# Altium PCB MC_CK.PcbDoc
Units mm, origin at the board's own origin, x right, y up, seen from the top; angles counter-clockwise.
Board outline 167.51 x 90.01 mm, 2 copper layers (Top Layer, Bottom Layer); 6 components, 0 nets, 144 pads, 0 vias.
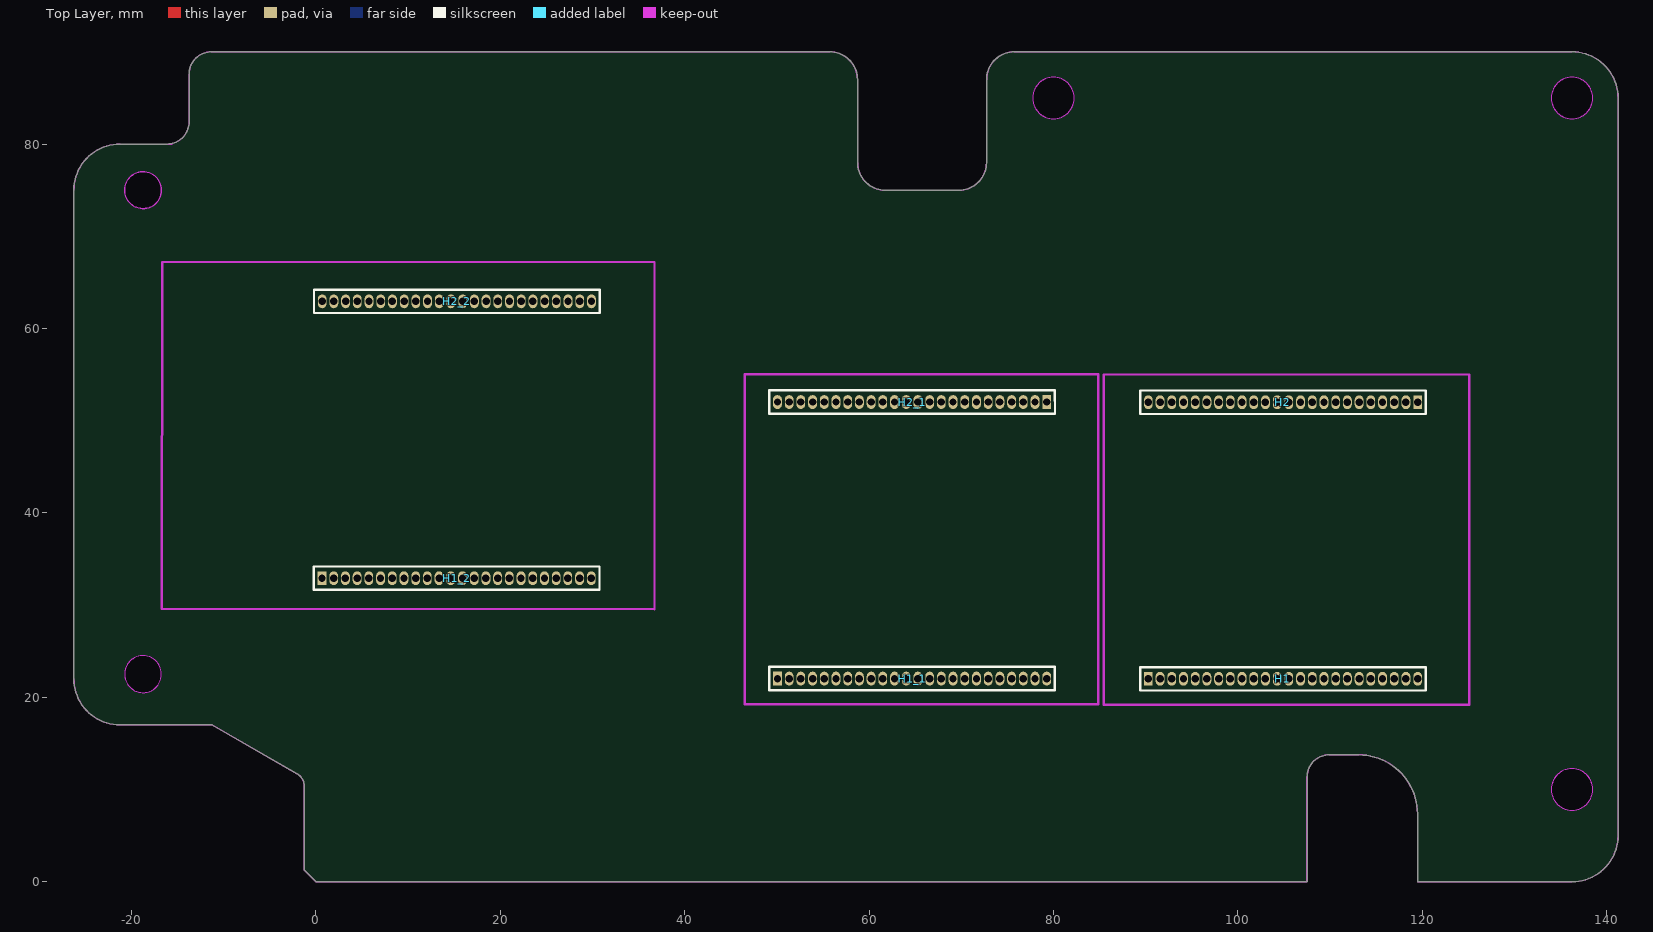
[diagram p0: Top Layer view]
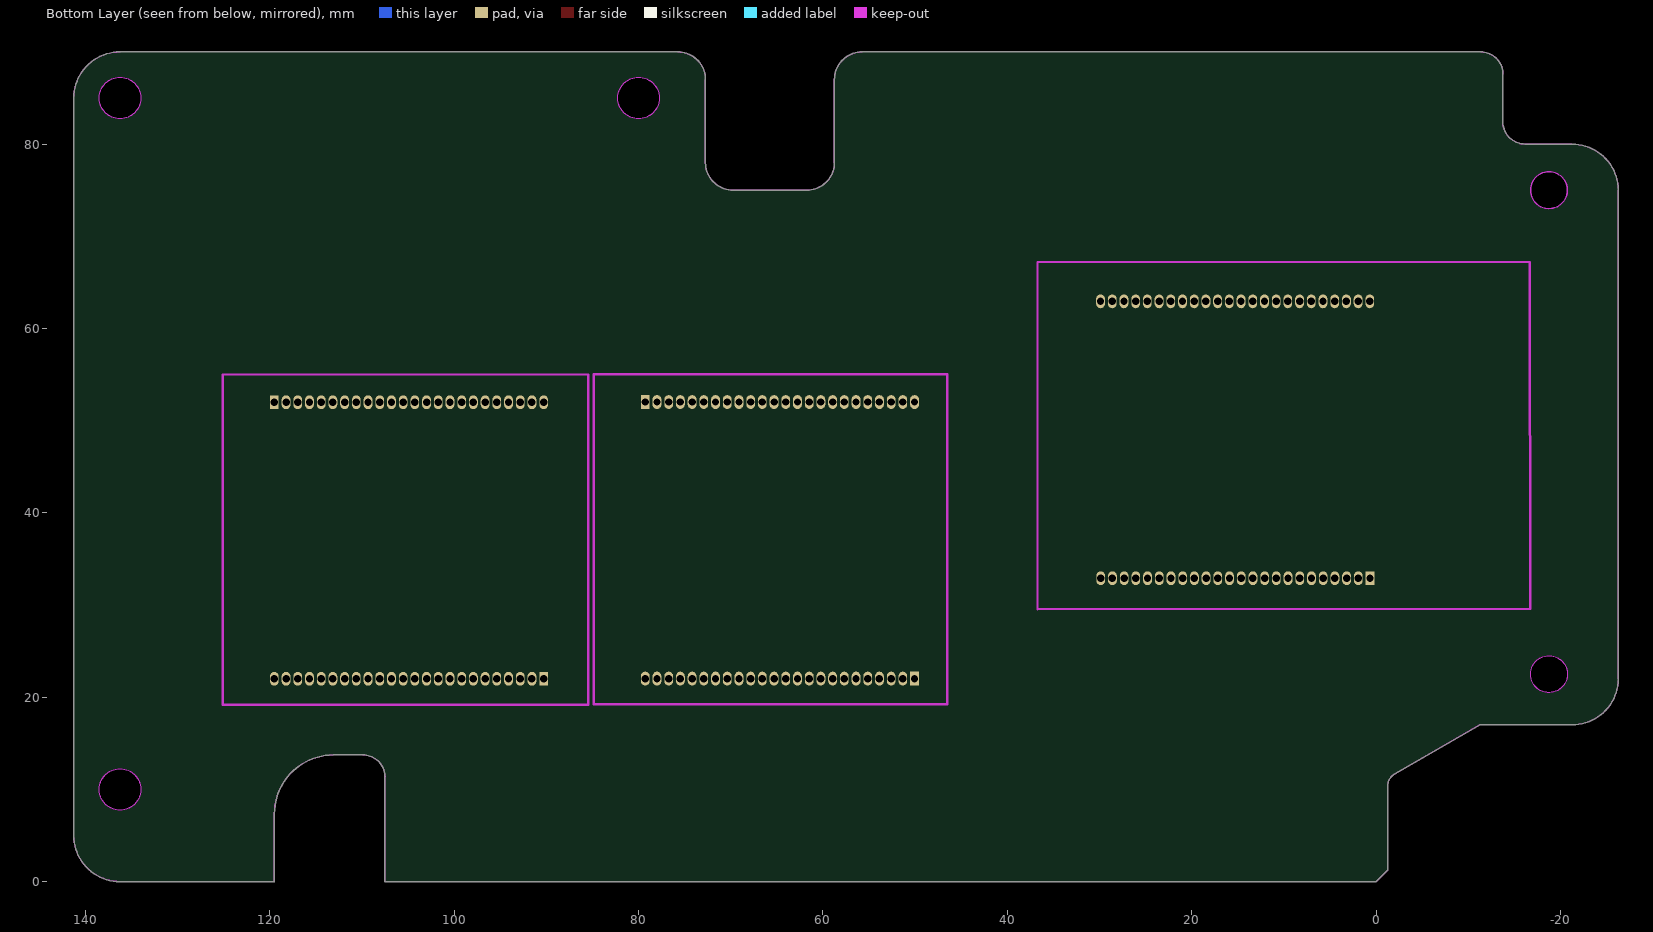
[diagram p1: Bottom Layer view, seen from below]

## Layer stack, top to bottom
Top Solder: solder mask 0.0102, Solder Resist, Dk 3.5
Top Layer: signal copper 0.0356
Dielectric 1: dielectric 0.32, FR-4, Dk 4.8
Bottom Layer: signal copper 0.0356
Bottom Solder: solder mask 0.0102, Solder Resist, Dk 3.5

## Board outline
-11.252,16.993 -2.056,11.706 -2.056,11.705 cw(c-2.85,10.324) -1.257,10.324 -1.257,1.25 -1.255,1.245 -0.005,-0.005 0,-0.007 107.5,-0.007 107.507,0 107.507,11.35 cw(c109.9,11.35) 109.9,13.743 113.1,13.743 cw(c113.1,7.35) 119.493,7.35 119.493,0 119.5,-0.007 136.25,-0.007 ccw(c136.25,5) 141.257,5 141.257,85 ccw(c136.25,85) 136.25,90.007 75.75,90.007 ccw(c75.75,87) 72.743,87 72.743,78 cw(c69.75,78) 69.75,75.007 61.75,75.007 cw(c61.75,78) 58.757,78 58.757,87 ccw(c55.75,87) 55.75,90.007 -11.35,90.007 ccw(c-11.35,87.6) -13.757,87.6 -13.757,82.4 cw(c-16.15,82.4) -16.15,80.007 -21.25,80.007 ccw(c-21.25,75) -26.257,75 -26.257,22 ccw(c-21.25,22) -21.25,16.993
cut-out: 134,85 ccw(c136.25,85) 136.25,82.75 ccw(c136.25,85) 138.5,85 ccw(c136.25,85) 136.25,87.25 ccw(c136.25,85)
cut-out: 134,10 ccw(c136.25,10) 136.25,7.75 ccw(c136.25,10) 138.5,10 ccw(c136.25,10) 136.25,12.25 ccw(c136.25,10)
cut-out: 77.75,85 ccw(c80,85) 80,82.75 ccw(c80,85) 82.25,85 ccw(c80,85) 80,87.25 ccw(c80,85)
cut-out: -18.75,73 cw(c-18.75,75) -20.75,75 cw(c-18.75,75) -18.75,77 cw(c-18.75,75) -16.75,75 cw(c-18.75,75)
cut-out: -20.75,22.5 ccw(c-18.75,22.5) -18.75,20.5 ccw(c-18.75,22.5) -16.75,22.5 ccw(c-18.75,22.5) -18.75,24.5 ccw(c-18.75,22.5)

## Design rules (kind name [scope] priority, off if disabled: settings)
Clearance [All] p1: gap=0.254 ignorepadtopadclearanceinfootprint=FALSE except(0: Arc-Hole Track-Hole SMDPad-Hole THPad-Hole Via-Hole Fill-Hole Poly-Hole Region-Hole Text-Hole)
PolygonConnect [All] p1: connectstyle=Relief reliefconductorwidth=0.254 reliefentries=4 polygonreliefangle="90 Angle" airgapwidth=0.254
RoutingVias [All] p1: holewidth=0.711 width=1.27 viastyle="Through Hole" minholewidth=0.711 minwidth=1.27 maxholewidth=0.711 maxwidth=1.27
SolderMaskExpansion [All] p1: expansion=0.102 istentingtop=FALSE
Width [All] p1: maxlimit=0.254 minlimit=0.254 preferedwidth=0.254
30 further rules are at their usual default settings.

## Components (designator, comment, footprint, x,y, rotation, side; value= is the part's Value field where it differs from the comment)
H1 "Header 24" "header 24"#1 104.902,21.996 r0 top
H1_1 "Header 24" "header 24"#1 64.668,22.021 r0 top (schematic designator H1)
H1_2 "Header 24" "header 24"#1 15.265,32.915 r0 top (schematic designator H1)
H2 "Header 24" "header 24"#1 104.902,51.996 r180 top
H2_1 "Header 24" "header 24"#1 64.668,52.021 r180 top (schematic designator H2)
H2_2 "Header 24" "header 24"#2 15.285,62.941 r180 top (schematic designator H2)

## Footprints (in the part's own frame and the unit in brackets; to place one, negate y for a bottom-side part, rotate by r counter-clockwise, add the part's x,y. Pads: shape width x height; smd on the part's side, far side on the other; paste and mask are expansions set on the pad)
"header 24"#1 [mm]
  rect 0.95x1.5 hole 0.8: 1(-14.605,0)
  oval 0.95x1.5 hole 0.8: 2(-13.335,0) 3(-12.065,0) 4(-10.795,0) 5(-9.525,0) 6(-8.255,0) 7(-6.985,0) 8(-5.715,0) 9(-4.445,0) 10(-3.175,0) 11(-1.905,0) 12(-0.635,0) 13(0.635,0) 14(1.905,0) 15(3.175,0) 16(4.445,0) 17(5.715,0) 18(6.985,0) 19(8.255,0) 20(9.525,0) 21(10.795,0) 22(12.065,0) 23(13.335,0) 24(14.605,0)
  silkscreen extent -15.5,-1.27 15.49,1.27
"header 24"#2 [mm]
  oval 0.95x1.5 hole 0.8: 1(-14.605,0) 2(-13.335,0) 3(-12.065,0) 4(-10.795,0) 5(-9.525,0) 6(-8.255,0) 7(-6.985,0) 8(-5.715,0) 9(-4.445,0) 10(-3.175,0) 11(-1.905,0) 12(-0.635,0) 13(0.635,0) 14(1.905,0) 15(3.175,0) 16(4.445,0) 17(5.715,0) 18(6.985,0) 19(8.255,0) 20(9.525,0) 21(10.795,0) 22(12.065,0) 23(13.335,0) 24(14.605,0)
  silkscreen extent -15.5,-1.27 15.49,1.27

## Nets (pads, with @x,y where several pads share a name; then routed paths per layer and width w, separated by ;. In a path a pad name is that pad's centre, name@x,y a point inside that pad or via, vN(x,y) a via of type N, cw(c..) or ccw(c..) an arc to the next point about the centre after c; other vN are vias at no path point)
pads on no net: H1.1 H1.2 H1.3 H1.4 H1.5 H1.6 H1.7 H1.8 H1.9 H1.10 H1.11 H1.12 H1.13 H1.14 H1.15 H1.16 H1.17 H1.18 H1.19 H1.20 H1.21 H1.22 H1.23 H1.24 H1_1.1 H1_1.2 H1_1.3 H1_1.4 H1_1.5 H1_1.6 H1_1.7 H1_1.8 H1_1.9 H1_1.10 H1_1.11 H1_1.12 H1_1.13 H1_1.14 H1_1.15 H1_1.16 H1_1.17 H1_1.18 H1_1.19 H1_1.20 H1_1.21 H1_1.22 H1_1.23 H1_1.24 H1_2.1 H1_2.2 H1_2.3 H1_2.4 H1_2.5 H1_2.6 H1_2.7 H1_2.8 H1_2.9 H1_2.10 H1_2.11 H1_2.12 H1_2.13 H1_2.14 H1_2.15 H1_2.16 H1_2.17 H1_2.18 H1_2.19 H1_2.20 H1_2.21 H1_2.22 H1_2.23 H1_2.24 H2.1 H2.2 H2.3 H2.4 H2.5 H2.6 H2.7 H2.8 H2.9 H2.10 H2.11 H2.12 H2.13 H2.14 H2.15 H2.16 H2.17 H2.18 H2.19 H2.20 H2.21 H2.22 H2.23 H2.24 H2_1.1 H2_1.2 H2_1.3 H2_1.4 H2_1.5 H2_1.6 H2_1.7 H2_1.8 H2_1.9 H2_1.10 H2_1.11 H2_1.12 H2_1.13 H2_1.14 H2_1.15 H2_1.16 H2_1.17 H2_1.18 H2_1.19 H2_1.20 H2_1.21 H2_1.22 H2_1.23 H2_1.24 H2_2.1 H2_2.2 H2_2.3 H2_2.4 H2_2.5 H2_2.6 H2_2.7 H2_2.8 H2_2.9 H2_2.10 H2_2.11 H2_2.12 H2_2.13 H2_2.14 H2_2.15 H2_2.16 H2_2.17 H2_2.18 H2_2.19 H2_2.20 H2_2.21 H2_2.22 H2_2.23 H2_2.24

## Keep-outs
Keep-Out Layer:
  circle w0.013: c-18.75,22.5 r2
  circle w0.013: c-18.75,75 r2
  circle w0.013: c80,85 r2.25
  circle w0.013: c136.25,10 r2.25
  circle w0.013: c136.25,85 r2.25
  lines w0.013: -16.15,80 ccw(c-16.15,82.4) -13.75,82.4 -13.75,87.6 cw(c-11.35,87.6) -11.35,90 55.75,90 cw(c55.75,87) 58.75,87 58.75,78 ccw(c61.75,78) 61.75,75 69.75,75 ccw(c69.75,78) 72.75,78 ; -15.585,80 -21.25,80 ccw(c-21.25,75) -26.25,75 -26.25,22 ccw(c-21.25,22) -21.25,17 -18.589,17 -11.25,17 -2.052,11.711 cw(c-2.85,10.324) -1.25,10.324 ; 15.615,0 16.885,0 ; 18.115,0 19.385,0 ; 20.615,0 21.885,0 ; 23.115,0 24.385,0 ; 25.615,0 26.885,0 ; 28.115,0 29.385,0 ; 30.615,0 31.885,0 ; 33.115,0 34.385,0 ; 68.115,0 69.385,0 ; 70.615,0 71.885,0 ; 72.75,79.35 72.75,78 ; 73.115,0 74.385,0 ; 75.615,0 76.885,0 ; 78.115,0 79.385,0 ; 80.615,0 81.885,0 ; 83.115,0 84.385,0 ; 85.615,0 86.885,0 ; -1.25,1.25 0,0 ; -1.25,1.25 0,0 ; -1.25,1.25 -1.25,10.324 ; -1.25,1.25 -1.25,10.324 ; 0,0 107.5,0 ; 0,0 107.5,0 ; 72.75,78 72.75,87 cw(c75.75,87) 75.75,90 136.25,90 cw(c136.25,85) 141.25,85 141.25,5 cw(c136.25,5) 136.25,0 119.5,0 119.5,7.35 ccw(c113.1,7.35) 113.1,13.75 109.9,13.75 ccw(c109.9,11.35) 107.5,11.35 107.5,0
  lines w0.254: 36.728,29.537 -16.739,29.616 -16.685,67.169 -6.842,67.216 36.728,67.216 36.728,29.604 ; 46.507,19.227 84.861,19.227 84.861,55.041 46.507,55.041 46.507,19.227 ; 85.471,19.202 85.471,55.016 125.091,55.016 125.091,19.202 85.471,19.202